# EAGLE board display (EAGLE 5.10)

Size 151.26 x 130.18 mm. Coordinates in mm from the lower left corner, seen from the top.
Outline: 128.65,69.22 121.03,69.22
Outline: 121.03,73.03 128.65,73.03
Outline: 136.27,73.03 136.27,69.22 128.65,69.22
Outline: 128.65,69.22 128.65,73.03
Outline: 128.65,73.03 136.27,73.03
Outline: 113.41,69.22 105.79,69.22
Outline: 105.79,73.03 113.41,73.03
Outline: 121.03,73.03 121.03,69.22
Outline: 121.03,69.22 113.41,69.22
Outline: 113.41,69.22 113.41,73.03
Outline: 113.41,73.03 121.03,73.03
Outline: 98.17,69.22 90.55,69.22
Outline: 90.55,73.03 98.17,73.03
Outline: 105.79,73.03 105.79,69.22
Outline: 105.79,69.22 98.17,69.22
Outline: 98.17,69.22 98.17,73.03
Outline: 98.17,73.03 105.79,73.03
Outline: 82.93,69.22 75.31,69.22
Outline: 75.31,73.03 82.93,73.03
Outline: 90.55,73.03 90.55,69.22
Outline: 90.55,69.22 82.93,69.22
Outline: 82.93,69.22 82.93,73.03
Outline: 82.93,73.03 90.55,73.03
Outline: 67.69,69.22 60.07,69.22
Outline: 60.07,73.03 67.69,73.03
Outline: 75.31,73.03 75.31,69.22
Outline: 75.31,69.22 67.69,69.22
Outline: 67.69,69.22 67.69,73.03
Outline: 67.69,73.03 75.31,73.03
Outline: 52.45,69.22 44.83,69.22
Outline: 44.83,73.03 52.45,73.03
Outline: 60.07,73.03 60.07,69.22
Outline: 60.07,69.22 52.45,69.22
Outline: 52.45,69.22 52.45,73.03
Outline: 52.45,73.03 60.07,73.03
Outline: 37.21,69.22 29.59,69.22
Outline: 29.59,73.03 37.21,73.03
Outline: 44.83,73.03 44.83,69.22
Outline: 44.83,69.22 37.21,69.22
Outline: 37.21,69.22 37.21,73.03
Outline: 37.21,73.03 44.83,73.03
Outline: 21.97,69.22 14.35,69.22 14.35,73.03
Outline: 14.35,73.03 21.97,73.03
Outline: 29.59,73.03 29.59,69.22
Outline: 29.59,69.22 21.97,69.22
Outline: 21.97,69.22 21.97,73.03
Outline: 21.97,73.03 29.59,73.03
Outline: 128.65,76.83 121.03,76.83
Outline: 121.03,80.64 128.65,80.64
Outline: 136.27,80.64 136.27,76.83 128.65,76.83
Outline: 128.65,76.83 128.65,80.64
Outline: 128.65,80.64 136.27,80.64
Outline: 113.41,76.83 105.79,76.83
Outline: 105.79,80.64 113.41,80.64
Outline: 121.03,80.64 121.03,76.83
Outline: 121.03,76.83 113.41,76.83
Outline: 113.41,76.83 113.41,80.64
Outline: 113.41,80.64 121.03,80.64
Outline: 98.17,76.83 90.55,76.83
Outline: 90.55,80.64 98.17,80.64
Outline: 105.79,80.64 105.79,76.83
Outline: 105.79,76.83 98.17,76.83
Outline: 98.17,76.83 98.17,80.64
Outline: 98.17,80.64 105.79,80.64
Outline: 82.93,76.83 75.31,76.83
Outline: 75.31,80.64 82.93,80.64
Outline: 90.55,80.64 90.55,76.83
Outline: 90.55,76.83 82.93,76.83
Outline: 82.93,76.83 82.93,80.64
Outline: 82.93,80.64 90.55,80.64
Outline: 67.69,76.83 60.07,76.83
Outline: 60.07,80.64 67.69,80.64
Outline: 75.31,80.64 75.31,76.83
Outline: 75.31,76.83 67.69,76.83
Outline: 67.69,76.83 67.69,80.64
Outline: 67.69,80.64 75.31,80.64
Outline: 52.45,76.83 44.83,76.83
Outline: 44.83,80.64 52.45,80.64
Outline: 60.07,80.64 60.07,76.83
Outline: 60.07,76.83 52.45,76.83
Outline: 52.45,76.83 52.45,80.64
Outline: 52.45,80.64 60.07,80.64
Outline: 37.21,76.83 29.59,76.83
Outline: 29.59,80.64 37.21,80.64
Outline: 44.83,80.64 44.83,76.83
Outline: 44.83,76.83 37.21,76.83
Outline: 37.21,76.83 37.21,80.64
Outline: 37.21,80.64 44.83,80.64
Outline: 21.97,76.83 14.35,76.83 14.35,80.64 21.97,80.64
Outline: 29.59,80.64 29.59,76.83
Outline: 29.59,76.83 21.97,76.83
Outline: 21.97,76.83 21.97,80.64
Outline: 21.97,80.64 29.59,80.64
Outline: 128.65,84.45 121.03,84.45
Outline: 121.03,88.27 128.65,88.27
Outline: 136.27,88.27 136.27,84.45 128.65,84.45
Outline: 128.65,84.45 128.65,88.27
Outline: 128.65,88.27 136.27,88.27
Outline: 113.41,84.45 105.79,84.45
Outline: 105.79,88.27 113.41,88.27
Outline: 121.03,88.27 121.03,84.45
Outline: 121.03,84.45 113.41,84.45
Outline: 113.41,84.45 113.41,88.27
Outline: 113.41,88.27 121.03,88.27
Outline: 98.17,84.45 90.55,84.45
Outline: 90.55,88.27 98.17,88.27
Outline: 105.79,88.27 105.79,84.45
Outline: 105.79,84.45 98.17,84.45
Outline: 98.17,84.45 98.17,88.27
Outline: 98.17,88.27 105.79,88.27
Outline: 82.93,84.45 75.31,84.45
Outline: 75.31,88.27 82.93,88.27
Outline: 90.55,88.27 90.55,84.45
Outline: 90.55,84.45 82.93,84.45
Outline: 82.93,84.45 82.93,88.27
Outline: 82.93,88.27 90.55,88.27
Outline: 67.69,84.45 60.07,84.45
Outline: 60.07,88.27 67.69,88.27
Outline: 75.31,88.27 75.31,84.45
Outline: 75.31,84.45 67.69,84.45
Outline: 67.69,84.45 67.69,88.27
Outline: 67.69,88.27 75.31,88.27
Outline: 52.45,84.45 44.83,84.45
Outline: 44.83,88.27 52.45,88.27
Outline: 60.07,88.27 60.07,84.45
Outline: 60.07,84.45 52.45,84.45
Outline: 52.45,84.45 52.45,88.27
Outline: 52.45,88.27 60.07,88.27
Outline: 37.21,84.45 29.59,84.45
Outline: 29.59,88.27 37.21,88.27
Outline: 44.83,88.27 44.83,84.45
Outline: 44.83,84.45 37.21,84.45
Outline: 37.21,84.45 37.21,88.27
Outline: 37.21,88.27 44.83,88.27
Outline: 21.97,84.45 14.35,84.45 14.35,88.27
Outline: 29.59,88.27 29.59,84.45
Outline: 29.59,84.45 21.97,84.45
Outline: 21.97,84.45 21.97,88.27
Outline: 21.97,88.27 29.59,88.27
Outline: 128.65,92.08 121.03,92.08
Outline: 121.03,95.89 128.65,95.89
Outline: 136.27,95.89 136.27,92.08
Outline: 136.27,92.08 128.65,92.08
Outline: 128.65,92.08 128.65,95.89
Outline: 128.65,95.89 136.27,95.89
Outline: 113.41,92.08 105.79,92.08
Outline: 105.79,95.89 113.41,95.89
Outline: 121.03,95.89 121.03,92.08
Outline: 121.03,92.08 113.41,92.08
Outline: 113.41,92.08 113.41,95.89
Outline: 113.41,95.89 121.03,95.89
Outline: 98.17,92.08 90.55,92.08
Outline: 90.55,95.89 98.17,95.89
Outline: 105.79,95.89 105.79,92.08
Outline: 105.79,92.08 98.17,92.08
Outline: 98.17,92.08 98.17,95.89
Outline: 98.17,95.89 105.79,95.89
Outline: 82.93,92.08 75.31,92.08
Outline: 75.31,95.89 82.93,95.89
Outline: 90.55,95.89 90.55,92.08
Outline: 90.55,92.08 82.93,92.08
Outline: 82.93,92.08 82.93,95.89
Outline: 82.93,95.89 90.55,95.89
Outline: 67.69,92.08 60.07,92.08
Outline: 60.07,95.89 67.69,95.89
Outline: 75.31,95.89 75.31,92.08
Outline: 75.31,92.08 67.69,92.08
Outline: 67.69,92.08 67.69,95.89
Outline: 67.69,95.89 75.31,95.89
Outline: 52.45,92.08 44.83,92.08
Outline: 44.83,95.89 52.45,95.89
Outline: 60.07,95.89 60.07,92.08
Outline: 60.07,92.08 52.45,92.08
Outline: 52.45,92.08 52.45,95.89
Outline: 52.45,95.89 60.07,95.89
Outline: 37.21,92.08 29.59,92.08
Outline: 29.59,95.89 37.21,95.89
Outline: 44.83,95.89 44.83,92.08
Outline: 44.83,92.08 37.21,92.08
Outline: 37.21,92.08 37.21,95.89
Outline: 37.21,95.89 44.83,95.89
Outline: 21.97,92.08 14.35,92.08 14.35,95.89
Outline: 29.59,95.89 29.59,92.08
Outline: 29.59,92.08 21.97,92.08
Outline: 21.97,92.08 21.97,95.89
Outline: 21.97,95.89 29.59,95.89
Outline: 128.65,99.69 121.03,99.69
Outline: 121.03,103.5 128.65,103.5
Outline: 128.65,99.69 136.27,99.69 136.27,100.46
Outline: 128.65,99.69 128.65,103.5
Outline: 128.65,103.5 136.27,103.5
Outline: 113.41,99.69 105.79,99.69
Outline: 105.79,103.5 113.41,103.5
Outline: 121.03,103.5 121.03,99.69
Outline: 121.03,99.69 113.41,99.69
Outline: 113.41,99.69 113.41,103.5
Outline: 113.41,103.5 121.03,103.5
Outline: 98.17,99.69 90.55,99.69
Outline: 90.55,103.5 98.17,103.5
Outline: 105.79,103.5 105.79,99.69
Outline: 105.79,99.69 98.17,99.69
Outline: 98.17,99.69 98.17,103.5
Outline: 98.17,103.5 105.79,103.5
Outline: 82.93,99.69 75.31,99.69
Outline: 75.31,103.5 82.93,103.5
Outline: 90.55,103.5 90.55,99.69
Outline: 90.55,99.69 82.93,99.69
Outline: 82.93,99.69 82.93,103.5
Outline: 82.93,103.5 90.55,103.5
Outline: 67.69,99.69 60.07,99.69
Outline: 60.07,103.5 67.69,103.5
Outline: 75.31,103.5 75.31,99.69
Outline: 75.31,99.69 67.69,99.69
Outline: 67.69,99.69 67.69,103.5
Outline: 67.69,103.5 75.31,103.5
Outline: 52.45,99.69 44.83,99.69
Outline: 44.83,103.5 52.45,103.5
Outline: 60.07,103.5 60.07,99.69
Outline: 60.07,99.69 52.45,99.69
Outline: 52.45,99.69 52.45,103.5
Outline: 52.45,103.5 60.07,103.5
Outline: 37.21,99.69 29.59,99.69
Outline: 29.59,103.5 37.21,103.5
Outline: 44.83,103.5 44.83,99.69
Outline: 44.83,99.69 37.21,99.69
Outline: 37.21,99.69 37.21,103.5
Outline: 37.21,103.5 44.83,103.5
Outline: 21.97,99.69 14.35,99.69
Outline: 14.35,99.69 14.35,102.74
Outline: 14.35,102.74 14.35,103.5 21.97,103.5
Outline: 29.59,103.5 29.59,99.69
Outline: 29.59,99.69 21.97,99.69
Outline: 21.97,99.69 21.97,103.5
Outline: 21.97,103.5 29.59,103.5
Outline: 128.65,107.31 121.03,107.31
Outline: 121.03,111.12 128.65,111.12
Outline: 136.27,107.31 136.27,111.12 128.65,111.12
Outline: 136.27,107.31 128.65,107.31
Outline: 128.65,107.31 128.65,111.12
Outline: 113.41,107.31 105.79,107.31
Outline: 105.79,111.12 113.41,111.12
Outline: 121.03,111.12 121.03,107.31
Outline: 121.03,107.31 113.41,107.31
Outline: 113.41,107.31 113.41,111.12
Outline: 113.41,111.12 121.03,111.12
Outline: 98.17,107.31 90.55,107.31
Outline: 90.55,111.12 98.17,111.12
Outline: 105.79,111.12 105.79,107.31
Outline: 105.79,107.31 98.17,107.31
Outline: 98.17,107.31 98.17,111.12
Outline: 98.17,111.12 105.79,111.12
Outline: 82.93,107.31 75.31,107.31
Outline: 75.31,111.12 82.93,111.12
Outline: 90.55,111.12 90.55,107.31
Outline: 90.55,107.31 82.93,107.31
Outline: 82.93,107.31 82.93,111.12
Outline: 82.93,111.12 90.55,111.12
Outline: 67.69,107.31 60.07,107.31
Outline: 60.07,111.12 67.69,111.12
Outline: 75.31,111.12 75.31,107.31
Outline: 75.31,107.31 67.69,107.31
Outline: 67.69,107.31 67.69,111.12
Outline: 67.69,111.12 75.31,111.12
Outline: 52.45,107.31 44.83,107.31
Outline: 44.83,111.12 52.45,111.12
Outline: 60.07,111.12 60.07,107.31
Outline: 60.07,107.31 52.45,107.31
Outline: 52.45,107.31 52.45,111.12
Outline: 52.45,111.12 60.07,111.12
Outline: 37.21,107.31 29.59,107.31
Outline: 29.59,111.12 37.21,111.12
Outline: 44.83,111.12 44.83,107.31
Outline: 44.83,107.31 37.21,107.31
Outline: 37.21,107.31 37.21,111.12
Outline: 37.21,111.12 44.83,111.12
Outline: 21.97,107.31 14.35,107.31 14.35,111.12 21.97,111.12
Outline: 29.59,111.12 29.59,107.31
Outline: 29.59,107.31 21.97,107.31
Outline: 21.97,107.31 21.97,111.12
Outline: 21.97,111.12 29.59,111.12
Outline: 128.65,114.94 121.03,114.94
Outline: 121.03,118.75 128.65,118.75
Outline: 136.27,114.94 136.27,118.75 128.65,118.75
Outline: 136.27,114.94 128.65,114.94
Outline: 128.65,114.94 128.65,118.75
Outline: 113.41,114.94 105.79,114.94
Outline: 105.79,118.75 113.41,118.75
Outline: 121.03,118.75 121.03,114.94
Outline: 121.03,114.94 113.41,114.94
Outline: 113.41,114.94 113.41,118.75
Outline: 113.41,118.75 121.03,118.75
Outline: 98.17,114.94 90.55,114.94
Outline: 90.55,118.75 98.17,118.75
Outline: 105.79,118.75 105.79,114.94
Outline: 105.79,114.94 98.17,114.94
Outline: 98.17,114.94 98.17,118.75
Outline: 98.17,118.75 105.79,118.75
Outline: 82.93,114.94 75.31,114.94
Outline: 75.31,118.75 82.93,118.75
Outline: 90.55,118.75 90.55,114.94
Outline: 90.55,114.94 82.93,114.94
Outline: 82.93,114.94 82.93,118.75
Outline: 82.93,118.75 90.55,118.75
Outline: 67.69,114.94 60.07,114.94
Outline: 60.07,118.75 67.69,118.75
Outline: 75.31,118.75 75.31,114.94
Outline: 75.31,114.94 67.69,114.94
Outline: 67.69,114.94 67.69,118.75
Outline: 67.69,118.75 75.31,118.75
Outline: 52.45,114.94 44.83,114.94
Outline: 44.83,118.75 52.45,118.75
Outline: 60.07,118.75 60.07,114.94
Outline: 60.07,114.94 52.45,114.94
Outline: 52.45,114.94 52.45,118.75
Outline: 52.45,118.75 60.07,118.75
Outline: 37.21,114.94 29.59,114.94
Outline: 29.59,118.75 37.21,118.75
Outline: 44.83,118.75 44.83,114.94
Outline: 44.83,114.94 37.21,114.94
Outline: 37.21,114.94 37.21,118.75
Outline: 37.21,118.75 44.83,118.75
Outline: 21.97,118.75 14.35,118.75 14.35,114.94
Outline: 29.59,118.75 29.59,114.94
Outline: 29.59,114.94 21.97,114.94
Outline: 21.97,114.94 21.97,118.75
Outline: 21.97,118.75 29.59,118.75
Outline: 128.65,122.56 121.03,122.56
Outline: 121.03,126.36 128.65,126.36
Outline: 136.27,122.56 136.27,126.36 128.65,126.36
Outline: 136.27,122.56 128.65,122.56
Outline: 128.65,122.56 128.65,126.36
Outline: 113.41,122.56 105.79,122.56
Outline: 105.79,126.36 113.41,126.36
Outline: 121.03,126.36 121.03,122.56
Outline: 121.03,122.56 113.41,122.56
Outline: 113.41,122.56 113.41,126.36
Outline: 113.41,126.36 121.03,126.36
Outline: 98.17,122.56 90.55,122.56
Outline: 90.55,126.36 98.17,126.36
Outline: 105.79,126.36 105.79,122.56
Outline: 105.79,122.56 98.17,122.56
Outline: 98.17,122.56 98.17,126.36
Outline: 98.17,126.36 105.79,126.36
Outline: 82.93,122.56 75.31,122.56
Outline: 75.31,126.36 82.93,126.36
Outline: 90.55,126.36 90.55,122.56
Outline: 90.55,122.56 82.93,122.56
Outline: 82.93,122.56 82.93,126.36
Outline: 82.93,126.36 90.55,126.36
Outline: 67.69,122.56 60.07,122.56
Outline: 60.07,126.36 67.69,126.36
Outline: 75.31,126.36 75.31,122.56
Outline: 75.31,122.56 67.69,122.56
Outline: 67.69,122.56 67.69,126.36
Outline: 67.69,126.36 75.31,126.36
Outline: 52.45,122.56 44.83,122.56
Outline: 44.83,126.36 52.45,126.36
Outline: 60.07,126.36 60.07,122.56
Outline: 60.07,122.56 52.45,122.56
Outline: 52.45,122.56 52.45,126.36
Outline: 52.45,126.36 60.07,126.36
Outline: 37.21,122.56 29.59,122.56
Outline: 29.59,126.36 37.21,126.36
Outline: 44.83,126.36 44.83,122.56
Outline: 44.83,122.56 37.21,122.56
Outline: 37.21,122.56 37.21,126.36
Outline: 37.21,126.36 44.83,126.36
Outline: 21.97,126.36 14.35,126.36 14.35,122.56
Outline: 29.59,126.36 29.59,122.56
Outline: 29.59,122.56 21.97,122.56
Outline: 21.97,122.56 21.97,126.36
Outline: 21.97,126.36 29.59,126.36
Outline: 136.27,103.5 136.27,104.27 139.7,104.27 139.7,100.46
Outline: 136.27,103.5 136.27,100.46
Outline: 140.97,100.46 140.97,107.31 136.27,107.31
Outline: 140.97,100.46 142.24,100.46
Outline: 142.24,100.46 142.24,114.94 136.27,114.94
Outline: 142.24,100.46 143.51,100.46
Outline: 143.51,100.46 143.51,122.56 136.27,122.56
Outline: 143.51,100.46 144.78,100.46 144.78,109.22
Outline: 144.78,109.22 144.78,130.18
Outline: 14.35,130.18 75.31,130.18
Outline: 75.31,130.18 144.78,130.18
Outline: 140.97,100.46 139.7,100.46
Outline: 139.7,100.46 136.27,100.46
Outline: 136.27,95.89 138.3,95.89 138.3,98.81 139.7,98.81
Outline: 139.7,98.81 140.97,98.81 140.97,94.87 142.24,94.87
Outline: 142.24,94.87 142.24,98.81
Outline: 142.24,98.81 142.24,100.46
Outline: 136.27,92.08 139.7,92.08
Outline: 139.7,92.08 142.24,92.08 142.24,94.87
Outline: 139.7,98.81 139.7,92.08
Outline: 142.24,98.81 143.51,98.81
Outline: 143.51,98.81 144.78,98.81
Outline: 144.78,98.81 146.05,98.81
Outline: 136.27,88.27 143.51,88.27 143.51,98.81
Outline: 136.27,80.64 144.78,80.64 144.78,98.81
Outline: 136.27,73.03 146.05,73.03 146.05,98.81
Outline: 146.05,98.81 146.05,104.65 148.97,104.65 148.97,109.22 144.78,109.22
Outline: 11.05,102.74 11.05,98.93 14.35,98.93 14.35,99.69
Outline: 9.78,102.74 9.78,95.89 14.35,95.89
Outline: 14.35,95.89 21.97,95.89
Outline: 9.78,102.74 8.51,102.74
Outline: 8.51,102.74 8.51,88.27 14.35,88.27
Outline: 14.35,88.27 21.97,88.27
Outline: 8.51,102.74 7.24,102.74
Outline: 7.24,102.74 7.24,80.64 14.48,80.64
Outline: 7.24,102.74 5.97,102.74 5.97,93.98
Outline: 9.78,102.74 11.05,102.74
Outline: 11.05,102.74 14.35,102.74
Outline: 14.48,107.31 12.45,107.31 12.45,104.39 11.05,104.39
Outline: 11.05,104.39 9.78,104.39 9.78,108.33 8.51,108.33
Outline: 8.51,108.33 8.51,104.39
Outline: 8.51,104.39 8.51,102.74
Outline: 14.48,111.12 11.05,111.12
Outline: 11.05,111.12 8.51,111.12 8.51,108.33
Outline: 11.05,104.39 11.05,111.12
Outline: 8.51,104.39 7.24,104.39
Outline: 7.24,104.39 5.97,104.39
Outline: 5.97,104.39 4.7,104.39
Outline: 21.97,114.94 14.35,114.94
Outline: 14.35,114.94 7.24,114.94 7.24,104.39
Outline: 21.97,122.56 14.35,122.56
Outline: 14.35,122.56 5.97,122.56 5.97,104.39
Outline: 14.48,130.18 4.7,130.18
Outline: 4.7,130.18 4.7,104.39
Outline: 4.7,104.39 4.7,98.55 1.78,98.55 1.78,93.98 5.97,93.98
Outline: 14.35,73.03 5.97,73.03 5.97,93.98
Outline: 135.13,53.85 132.21,53.85
Outline: 132.21,53.85 85.47,53.85
Outline: 85.47,53.85 85.47,48.13
Outline: 85.47,48.13 85.47,44.32 91.31,44.32 91.31,51.94 112.39,51.94 112.39,44.32 118.24,44.32 118.24,51.94 130.94,51.94 130.94,42.42 137.67,42.42 137.67,52.58
Outline: 137.67,52.58 136.4,52.58 136.4,49.15
Outline: 136.4,49.15 135.13,49.15
Outline: 135.13,49.15 135.13,54.99
Outline: 135.13,54.99 135.13,58.55 132.21,58.55 132.21,53.85
Outline: 132.21,53.85 132.21,49.15
Outline: 132.21,49.15 135.13,49.15
Outline: 132.21,49.15 132.21,43.69 136.4,43.69 136.4,49.15
Outline: 137.67,52.58 138.94,52.58
Outline: 138.94,52.58 138.94,41.15 129.67,41.15 129.67,50.04 123.32,50.04
Outline: 123.32,50.04 120.78,50.04 120.78,42.42
Outline: 120.78,42.42 109.86,42.42
Outline: 109.86,42.42 109.86,50.04 107.31,50.04
Outline: 107.31,50.04 96.39,50.04
Outline: 96.39,50.04 96.39,42.29 93.85,42.29
Outline: 93.85,42.29 82.93,42.29
Outline: 82.93,42.29 82.93,48.13
Outline: 82.93,48.13 85.47,48.13
Outline: 82.93,48.13 80.39,48.13
Outline: 80.39,48.13 80.39,42.29 82.93,42.29
Outline: 138.94,52.58 140.21,52.58
Outline: 140.21,52.58 140.21,39.88 128.4,39.88 128.4,48.13 125.86,48.13 125.86,40.51 104.78,40.51 104.78,48.13 98.93,48.13 98.93,40.39 77.85,40.39 77.85,48.13
Outline: 77.85,48.13 80.39,48.13
Outline: 77.85,48.13 75.31,48.13
Outline: 141.48,38.48 141.48,52.58 140.21,52.58
Outline: 93.85,42.29 93.85,50.04 96.39,50.04
Outline: 107.31,50.04 107.31,42.42 109.86,42.42
Outline: 120.78,42.42 123.32,42.42 123.32,50.04
Outline: 135.13,54.99 136.4,54.99
Outline: 136.4,54.99 136.4,59.82 130.94,59.82 130.94,55.88 118.24,55.88 118.24,63.37 112.39,63.37 112.39,55.88 91.31,55.88 91.31,63.5 85.47,63.5 85.47,59.44
Outline: 85.47,59.44 82.93,59.44
Outline: 82.93,59.44 82.93,65.41
Outline: 82.93,65.41 80.39,65.41 80.39,59.44
Outline: 77.85,59.44 77.85,67.31 98.93,67.31 98.93,59.69 104.78,59.69 104.78,67.31 125.86,67.31 125.86,59.69 128.4,59.69 128.4,62.36 138.94,62.36 138.94,54.99
Outline: 138.94,54.99 137.67,54.99
Outline: 136.4,54.99 137.67,54.99
Outline: 137.67,54.99 137.67,61.09 129.67,61.09 129.67,57.66 123.32,57.66
Outline: 123.32,57.66 123.32,65.41 120.78,65.41
Outline: 120.78,65.41 120.78,57.66 123.32,57.66
Outline: 138.94,54.99 140.21,54.99
Outline: 140.21,54.99 140.21,63.63 128.4,63.63 128.4,69.09
Outline: 128.4,69.09 75.31,69.09
Outline: 75.31,69.09 75.31,59.44
Outline: 75.31,59.44 77.85,59.44
Outline: 77.85,59.44 80.39,59.44
Outline: 80.39,59.44 82.93,59.44
Outline: 85.47,53.85 85.47,59.44
Outline: 82.93,65.41 93.85,65.41
Outline: 93.85,65.41 93.85,57.66 96.52,57.66
Outline: 96.52,57.66 107.31,57.66
Outline: 107.31,57.66 109.86,57.66 109.86,65.41
Outline: 109.86,65.41 120.78,65.41
Outline: 109.86,65.41 107.31,65.41 107.31,57.66
Outline: 93.85,65.41 96.52,65.41 96.52,57.66
Outline: 140.21,54.99 141.48,54.99 141.48,69.09 128.4,69.09
Outline: 15.37,53.72 18.29,53.72
Outline: 18.29,53.72 65.02,53.72
Outline: 65.02,53.72 65.02,59.44
Outline: 65.02,59.44 65.02,63.25 59.18,63.25 59.18,55.63 38.1,55.63 38.1,63.25 32.26,63.25 32.26,55.63 19.56,55.63 19.56,65.15 12.83,65.15 12.83,54.99
Outline: 12.83,54.99 14.1,54.99 14.1,58.42
Outline: 14.1,58.42 15.37,58.42
Outline: 15.37,58.42 15.37,52.58
Outline: 15.37,52.58 15.37,49.02 18.29,49.02 18.29,53.72
Outline: 18.29,53.72 18.29,58.42
Outline: 18.29,58.42 15.37,58.42
Outline: 18.29,58.42 18.29,63.88 14.1,63.88 14.1,58.42
Outline: 12.83,54.99 11.56,54.99
Outline: 11.56,54.99 11.56,66.42 20.83,66.42 20.83,57.53 27.18,57.53
Outline: 27.18,57.53 29.72,57.53 29.72,65.15
Outline: 29.72,65.15 40.64,65.15
Outline: 40.64,65.15 40.64,57.53 43.18,57.53
Outline: 43.18,57.53 54.1,57.53
Outline: 54.1,57.53 54.1,65.28 56.64,65.28
Outline: 56.64,65.28 67.56,65.28
Outline: 67.56,65.28 67.56,59.44
Outline: 67.56,59.44 65.02,59.44
Outline: 67.56,59.44 70.1,59.44
Outline: 70.1,59.44 70.1,65.28 67.56,65.28
Outline: 11.56,54.99 10.29,54.99
Outline: 10.29,54.99 10.29,67.69 22.1,67.69 22.1,59.44 24.64,59.44 24.64,67.06 45.72,67.06 45.72,59.44 51.56,59.44 51.56,67.18 72.64,67.18 72.64,59.44
Outline: 72.64,59.44 70.1,59.44
Outline: 72.64,59.44 75.31,59.44
Outline: 75.31,69.09 9.02,69.09 9.02,54.99 10.29,54.99
Outline: 56.64,65.28 56.64,57.53 54.1,57.53
Outline: 43.18,57.53 43.18,65.15 40.64,65.15
Outline: 29.72,65.15 27.18,65.15 27.18,57.53
Outline: 15.37,52.58 14.1,52.58
Outline: 14.1,52.58 14.1,47.75 19.56,47.75 19.56,51.69 32.26,51.69 32.26,44.2 38.1,44.2 38.1,51.69 59.18,51.69 59.18,44.07 65.02,44.07 65.02,48.13
Outline: 65.02,48.13 67.56,48.13
Outline: 67.56,48.13 67.56,42.16
Outline: 67.56,42.16 70.1,42.16 70.1,48.13
Outline: 72.64,48.13 72.64,40.26 51.56,40.26 51.56,47.88 45.72,47.88 45.72,40.26 24.64,40.26 24.64,47.88 22.1,47.88 22.1,45.21 11.56,45.21 11.56,52.58
Outline: 11.56,52.58 12.83,52.58
Outline: 14.1,52.58 12.83,52.58
Outline: 12.83,52.58 12.83,46.48 20.83,46.48 20.83,49.91 27.18,49.91
Outline: 27.18,49.91 27.18,42.16 29.72,42.16
Outline: 29.72,42.16 29.72,49.91 27.18,49.91
Outline: 11.56,52.58 10.29,52.58
Outline: 10.29,52.58 10.29,43.94 22.1,43.94 22.1,38.48
Outline: 22.1,38.48 75.31,38.48
Outline: 75.31,38.48 75.31,48.13
Outline: 75.31,48.13 72.64,48.13
Outline: 72.64,48.13 70.1,48.13
Outline: 70.1,48.13 67.56,48.13
Outline: 65.02,53.72 65.02,48.13
Outline: 67.56,42.16 56.64,42.16
Outline: 56.64,42.16 56.64,49.91 53.98,49.91
Outline: 53.98,49.91 43.18,49.91
Outline: 43.18,49.91 40.64,49.91 40.64,42.16
Outline: 40.64,42.16 29.72,42.16
Outline: 40.64,42.16 43.18,42.16 43.18,49.91
Outline: 56.64,42.16 53.98,42.16 53.98,49.91
Outline: 10.29,52.58 9.02,52.58 9.02,38.48
Outline: 135.13,23.24 132.21,23.24
Outline: 132.21,23.24 85.47,23.24
Outline: 85.47,23.24 85.47,17.53
Outline: 85.47,17.53 85.47,13.72 91.31,13.72 91.31,21.34 112.39,21.34 112.39,13.72 118.24,13.72 118.24,21.34 130.94,21.34 130.94,11.81 137.67,11.81 137.67,21.97
Outline: 137.67,21.97 136.4,21.97 136.4,18.54
Outline: 136.4,18.54 135.13,18.54
Outline: 135.13,18.54 135.13,24.38
Outline: 135.13,24.38 135.13,27.94 132.21,27.94 132.21,23.24
Outline: 132.21,23.24 132.21,18.54
Outline: 132.21,18.54 135.13,18.54
Outline: 132.21,18.54 132.21,13.08 136.4,13.08 136.4,18.54
Outline: 137.67,21.97 138.94,21.97
Outline: 138.94,21.97 138.94,10.54 129.67,10.54 129.67,19.43 123.32,19.43
Outline: 123.32,19.43 120.78,19.43 120.78,11.81
Outline: 120.78,11.81 109.86,11.81
Outline: 109.86,11.81 109.86,19.43 107.31,19.43
Outline: 107.31,19.43 96.39,19.43
Outline: 96.39,19.43 96.39,11.68 93.85,11.68
Outline: 93.85,11.68 82.93,11.68
Outline: 82.93,11.68 82.93,17.53
Outline: 82.93,17.53 85.47,17.53
Outline: 82.93,17.53 80.39,17.53
Outline: 80.39,17.53 80.39,11.68 82.93,11.68
Outline: 138.94,21.97 140.21,21.97
Outline: 140.21,21.97 140.21,9.27 128.4,9.27 128.4,17.53 125.86,17.53 125.86,9.91 104.78,9.91 104.78,17.53 98.93,17.53 98.93,9.78 77.85,9.78 77.85,17.53
Outline: 77.85,17.53 80.39,17.53
Outline: 77.85,17.53 75.31,17.53
Outline: 75.31,7.87 141.48,7.87 141.48,21.97 140.21,21.97
Outline: 93.85,11.68 93.85,19.43 96.39,19.43
Outline: 107.31,19.43 107.31,11.81 109.86,11.81
Outline: 120.78,11.81 123.32,11.81 123.32,19.43
Outline: 135.13,24.38 136.4,24.38
Outline: 136.4,24.38 136.4,29.21 130.94,29.21 130.94,25.27 118.24,25.27 118.24,32.77 112.39,32.77 112.39,25.27 91.31,25.27 91.31,32.89 85.47,32.89 85.47,28.83
Outline: 85.47,28.83 82.93,28.83
Outline: 82.93,28.83 82.93,34.8
Outline: 82.93,34.8 80.39,34.8 80.39,28.83
Outline: 77.85,28.83 77.85,36.7 98.93,36.7 98.93,29.08 104.78,29.08 104.78,36.7 125.86,36.7 125.86,29.08 128.4,29.08 128.4,31.75 138.94,31.75 138.94,24.38
Outline: 138.94,24.38 137.67,24.38
Outline: 136.4,24.38 137.67,24.38
Outline: 137.67,24.38 137.67,30.48 129.67,30.48 129.67,27.05 123.32,27.05
Outline: 123.32,27.05 123.32,34.8 120.78,34.8
Outline: 120.78,34.8 120.78,27.05 123.32,27.05
Outline: 138.94,24.38 140.21,24.38
Outline: 140.21,24.38 140.21,33.02 128.4,33.02 128.4,38.48
Outline: 128.4,38.48 75.31,38.48
Outline: 75.31,38.48 75.31,28.83
Outline: 75.31,28.83 77.85,28.83
Outline: 77.85,28.83 80.39,28.83
Outline: 80.39,28.83 82.93,28.83
Outline: 85.47,23.24 85.47,28.83
Outline: 82.93,34.8 93.85,34.8
Outline: 93.85,34.8 93.85,27.05 96.52,27.05
Outline: 96.52,27.05 107.31,27.05
Outline: 107.31,27.05 109.86,27.05 109.86,34.8
Outline: 109.86,34.8 120.78,34.8
Outline: 109.86,34.8 107.31,34.8 107.31,27.05
Outline: 93.85,34.8 96.52,34.8 96.52,27.05
Outline: 140.21,24.38 141.48,24.38 141.48,38.48
Outline: 141.48,38.48 128.4,38.48
Outline: 15.37,23.11 18.29,23.11
Outline: 18.29,23.11 65.02,23.11
Outline: 65.02,23.11 65.02,28.83
Outline: 65.02,28.83 65.02,32.64 59.18,32.64 59.18,25.02 38.1,25.02 38.1,32.64 32.26,32.64 32.26,25.02 19.56,25.02 19.56,34.54 12.83,34.54 12.83,24.38
Outline: 12.83,24.38 14.1,24.38 14.1,27.81
Outline: 14.1,27.81 15.37,27.81
Outline: 15.37,27.81 15.37,21.97
Outline: 15.37,21.97 15.37,18.41 18.29,18.41 18.29,23.11
Outline: 18.29,23.11 18.29,27.81
Outline: 18.29,27.81 15.37,27.81
Outline: 18.29,27.81 18.29,33.27 14.1,33.27 14.1,27.81
Outline: 12.83,24.38 11.56,24.38
Outline: 11.56,24.38 11.56,35.81 20.83,35.81 20.83,26.92 27.18,26.92
Outline: 27.18,26.92 29.72,26.92 29.72,34.54
Outline: 29.72,34.54 40.64,34.54
Outline: 40.64,34.54 40.64,26.92 43.18,26.92
Outline: 43.18,26.92 54.1,26.92
Outline: 54.1,26.92 54.1,34.67 56.64,34.67
Outline: 56.64,34.67 67.56,34.67
Outline: 67.56,34.67 67.56,28.83
Outline: 67.56,28.83 65.02,28.83
Outline: 67.56,28.83 70.1,28.83
Outline: 70.1,28.83 70.1,34.67 67.56,34.67
Outline: 11.56,24.38 10.29,24.38
Outline: 10.29,24.38 10.29,37.08 22.1,37.08 22.1,28.83 24.64,28.83 24.64,36.45 45.72,36.45 45.72,28.83 51.56,28.83 51.56,36.58 72.64,36.58 72.64,28.83
Outline: 72.64,28.83 70.1,28.83
Outline: 72.64,28.83 75.31,28.83
Outline: 22.1,38.48 9.02,38.48
Outline: 9.02,38.48 9.02,24.38 10.29,24.38
Outline: 56.64,34.67 56.64,26.92 54.1,26.92
Outline: 43.18,26.92 43.18,34.54 40.64,34.54
Outline: 29.72,34.54 27.18,34.54 27.18,26.92
Outline: 15.37,21.97 14.1,21.97
Outline: 14.1,21.97 14.1,17.14 19.56,17.14 19.56,21.08 32.26,21.08 32.26,13.59 38.1,13.59 38.1,21.08 59.18,21.08 59.18,13.46 65.02,13.46 65.02,17.53
Outline: 65.02,17.53 67.56,17.53
Outline: 67.56,17.53 67.56,11.56
Outline: 67.56,11.56 70.1,11.56 70.1,17.53
Outline: 72.64,17.53 72.64,9.65 51.56,9.65 51.56,17.27 45.72,17.27 45.72,9.65 24.64,9.65 24.64,17.27 22.1,17.27 22.1,14.61 11.56,14.61 11.56,21.97
Outline: 11.56,21.97 12.83,21.97
Outline: 14.1,21.97 12.83,21.97
Outline: 12.83,21.97 12.83,15.88 20.83,15.88 20.83,19.3 27.18,19.3
Outline: 27.18,19.3 27.18,11.56 29.72,11.56
Outline: 29.72,11.56 29.72,19.3 27.18,19.3
Outline: 11.56,21.97 10.29,21.97
Outline: 10.29,21.97 10.29,13.34 22.1,13.34 22.1,7.87
Outline: 22.1,7.87 75.31,7.87
Outline: 75.31,7.87 75.31,17.53
Outline: 75.31,17.53 72.64,17.53
Outline: 72.64,17.53 70.1,17.53
Outline: 70.1,17.53 67.56,17.53
Outline: 65.02,23.11 65.02,17.53
Outline: 67.56,11.56 56.64,11.56
Outline: 56.64,11.56 56.64,19.3 53.98,19.3
Outline: 53.98,19.3 43.18,19.3
Outline: 43.18,19.3 40.64,19.3 40.64,11.56
Outline: 40.64,11.56 29.72,11.56
Outline: 40.64,11.56 43.18,11.56 43.18,19.3
Outline: 56.64,11.56 53.98,11.56 53.98,19.3
Outline: 10.29,21.97 9.02,21.97 9.02,7.87 22.1,7.87
Outline: 75.31,73.03 75.31,130.18
Outline: 4.7,130.18 0,130.18 0,0 151.26,0 151.26,130.18 144.78,130.18
Copper layers (1*16): Top 0.035mm / dielectric 1.5mm / Bottom 0.035mm
Design rules "default": minimum track width 10mil, minimum drill 24mil, track to track 8mil, track to pad 8mil, pad to pad 8mil, via to via 8mil, smd to smd 8mil, copper to edge 40mil, drill to drill 8mil, minimum pad ring 10mil, minimum via ring 8mil, stop-mask expansion 4mil, vias tented up to drill 0mil, thermal gap 10mil

## Footprints (pad centres in the part's own frame; a part is rotated, then mirrored left to right if it is on the bottom)
LED5MM = drill 0.813 octagon: A -1.27,0; K 1.27,0
SO14 = smd 0.6 x 2.2: 1 -3.81,-2.6; 2 -2.54,-2.6; 3 -1.27,-2.6; 4 0,-2.6; 5 1.27,-2.6; 6 2.54,-2.6; 7 3.81,-2.6; 8 3.81,2.6; 9 2.54,2.6; 10 1.27,2.6; 11 0,2.6; 12 -1.27,2.6; 13 -2.54,2.6; 14 -3.81,2.6
SA56-11 = drill 0.8 long: 1 -5.08,-7.62; 2 -2.54,-7.62; 3 0,-7.62; 4 2.54,-7.62; 5 5.08,-7.62; 6 5.08,7.62; 7 2.54,7.62; 8 0,7.62; 9 -2.54,7.62; 10 -5.08,7.62

## Placement (x,y rotation side)
E$1  [LED5MM]  124.84,73.03 90 top
E$2  [LED5MM]  132.46,73.03 90 top
E$3  [LED5MM]  109.6,73.03 90 top
E$4  [LED5MM]  117.22,73.03 90 top
E$5  [LED5MM]  94.36,73.03 90 top
E$6  [LED5MM]  101.98,73.03 90 top
E$7  [LED5MM]  79.12,73.03 90 top
E$8  [LED5MM]  86.74,73.03 90 top
E$9  [LED5MM]  63.88,73.03 90 top
E$10  [LED5MM]  71.5,73.03 90 top
E$11  [LED5MM]  48.64,73.03 90 top
E$12  [LED5MM]  56.26,73.03 90 top
E$13  [LED5MM]  33.4,73.03 90 top
E$14  [LED5MM]  41.02,73.03 90 top
E$15  [LED5MM]  18.16,73.03 90 top
E$16  [LED5MM]  25.78,73.03 90 top
E$17  [LED5MM]  124.84,80.64 90 top
E$18  [LED5MM]  132.46,80.64 90 top
E$19  [LED5MM]  109.6,80.64 90 top
E$20  [LED5MM]  117.22,80.64 90 top
E$21  [LED5MM]  94.36,80.64 90 top
E$22  [LED5MM]  101.98,80.64 90 top
E$23  [LED5MM]  79.12,80.64 90 top
E$24  [LED5MM]  86.74,80.64 90 top
E$25  [LED5MM]  63.88,80.64 90 top
E$26  [LED5MM]  71.5,80.64 90 top
E$27  [LED5MM]  48.64,80.64 90 top
E$28  [LED5MM]  56.26,80.64 90 top
E$29  [LED5MM]  33.4,80.64 90 top
E$30  [LED5MM]  41.02,80.64 90 top
E$31  [LED5MM]  18.16,80.64 90 top
E$32  [LED5MM]  25.78,80.64 90 top
E$33  [LED5MM]  124.84,88.27 90 top
E$34  [LED5MM]  132.46,88.27 90 top
E$35  [LED5MM]  109.6,88.27 90 top
E$36  [LED5MM]  117.22,88.27 90 top
E$37  [LED5MM]  94.36,88.27 90 top
E$38  [LED5MM]  101.98,88.27 90 top
E$39  [LED5MM]  79.12,88.27 90 top
E$40  [LED5MM]  86.74,88.27 90 top
E$41  [LED5MM]  63.88,88.27 90 top
E$42  [LED5MM]  71.5,88.27 90 top
E$43  [LED5MM]  48.64,88.27 90 top
E$44  [LED5MM]  56.26,88.27 90 top
E$45  [LED5MM]  33.4,88.27 90 top
E$46  [LED5MM]  41.02,88.27 90 top
E$47  [LED5MM]  18.16,88.27 90 top
E$48  [LED5MM]  25.78,88.27 90 top
E$49  [LED5MM]  124.84,95.89 90 top
E$50  [LED5MM]  132.46,95.89 90 top
E$51  [LED5MM]  109.6,95.89 90 top
E$52  [LED5MM]  117.22,95.89 90 top
E$53  [LED5MM]  94.36,95.89 90 top
E$54  [LED5MM]  101.98,95.89 90 top
E$55  [LED5MM]  79.12,95.89 90 top
E$56  [LED5MM]  86.74,95.89 90 top
E$57  [LED5MM]  63.88,95.89 90 top
E$58  [LED5MM]  71.5,95.89 90 top
E$59  [LED5MM]  48.64,95.89 90 top
E$60  [LED5MM]  56.26,95.89 90 top
E$61  [LED5MM]  33.4,95.89 90 top
E$62  [LED5MM]  41.02,95.89 90 top
E$63  [LED5MM]  18.16,95.89 90 top
E$64  [LED5MM]  25.78,95.89 90 top
E$65  [LED5MM]  124.84,103.5 90 top
E$66  [LED5MM]  132.46,103.5 90 top
E$67  [LED5MM]  109.6,103.5 90 top
E$68  [LED5MM]  117.22,103.5 90 top
E$69  [LED5MM]  94.36,103.5 90 top
E$70  [LED5MM]  101.98,103.5 90 top
E$71  [LED5MM]  79.12,103.5 90 top
E$72  [LED5MM]  86.74,103.5 90 top
E$73  [LED5MM]  63.88,103.5 90 top
E$74  [LED5MM]  71.5,103.5 90 top
E$75  [LED5MM]  48.64,103.5 90 top
E$76  [LED5MM]  56.26,103.5 90 top
E$77  [LED5MM]  33.4,103.5 90 top
E$78  [LED5MM]  41.02,103.5 90 top
E$79  [LED5MM]  18.16,103.5 90 top
E$80  [LED5MM]  25.78,103.5 90 top
E$81  [LED5MM]  124.84,111.12 90 top
E$82  [LED5MM]  132.46,111.12 90 top
E$83  [LED5MM]  109.6,111.12 90 top
E$84  [LED5MM]  117.22,111.12 90 top
E$85  [LED5MM]  94.36,111.12 90 top
E$86  [LED5MM]  101.98,111.12 90 top
E$87  [LED5MM]  79.12,111.12 90 top
E$88  [LED5MM]  86.74,111.12 90 top
E$89  [LED5MM]  63.88,111.12 90 top
E$90  [LED5MM]  71.5,111.12 90 top
E$91  [LED5MM]  48.64,111.12 90 top
E$92  [LED5MM]  56.26,111.12 90 top
E$93  [LED5MM]  33.4,111.12 90 top
E$94  [LED5MM]  41.02,111.12 90 top
E$95  [LED5MM]  18.16,111.12 90 top
E$96  [LED5MM]  25.78,111.12 90 top
E$97  [LED5MM]  124.84,118.75 90 top
E$98  [LED5MM]  132.46,118.75 90 top
E$99  [LED5MM]  109.6,118.75 90 top
E$100  [LED5MM]  117.22,118.75 90 top
E$101  [LED5MM]  94.36,118.75 90 top
E$102  [LED5MM]  101.98,118.75 90 top
E$103  [LED5MM]  79.12,118.75 90 top
E$104  [LED5MM]  86.74,118.75 90 top
E$105  [LED5MM]  63.88,118.75 90 top
E$106  [LED5MM]  71.5,118.75 90 top
E$107  [LED5MM]  48.64,118.75 90 top
E$108  [LED5MM]  56.26,118.75 90 top
E$109  [LED5MM]  33.4,118.75 90 top
E$110  [LED5MM]  41.02,118.75 90 top
E$111  [LED5MM]  18.16,118.75 90 top
E$112  [LED5MM]  25.78,118.75 90 top
E$113  [LED5MM]  124.84,126.36 90 top
E$114  [LED5MM]  132.46,126.36 90 top
E$115  [LED5MM]  109.6,126.36 90 top
E$116  [LED5MM]  117.22,126.36 90 top
E$117  [LED5MM]  94.36,126.36 90 top
E$118  [LED5MM]  101.98,126.36 90 top
E$119  [LED5MM]  79.12,126.36 90 top
E$120  [LED5MM]  86.74,126.36 90 top
E$121  [LED5MM]  63.88,126.36 90 top
E$122  [LED5MM]  71.5,126.36 90 top
E$123  [LED5MM]  48.64,126.36 90 top
E$124  [LED5MM]  56.26,126.36 90 top
E$125  [LED5MM]  33.4,126.36 90 top
E$126  [LED5MM]  41.02,126.36 90 top
E$127  [LED5MM]  18.16,126.36 90 top
E$128  [LED5MM]  25.78,126.36 90 top
E$139  [SO14]  142.94,99.71 180 top
E$140  [SO14]  7.81,103.49 0 top
E$141  [SO14]  138.24,53.74 180 top
E$142  [SA56-11]  81.85,53.8 0 top
E$143  [SA56-11]  95.31,53.8 0 top
E$144  [SA56-11]  108.77,53.8 0 top
E$145  [SA56-11]  122.23,53.8 0 top
E$146  [SO14]  12.26,53.83 0 top
E$147  [SA56-11]  68.65,53.77 180 top
E$148  [SA56-11]  55.19,53.77 180 top
E$149  [SA56-11]  41.72,53.77 180 top
E$150  [SA56-11]  28.26,53.77 180 top
E$151  [SO14]  138.24,23.13 180 top
E$152  [SA56-11]  81.85,23.19 0 top
E$153  [SA56-11]  95.31,23.19 0 top
E$154  [SA56-11]  108.77,23.19 0 top
E$155  [SA56-11]  122.23,23.19 0 top
E$156  [SO14]  12.26,23.22 0 top
E$157  [SA56-11]  68.65,23.16 180 top
E$158  [SA56-11]  55.19,23.16 180 top
E$159  [SA56-11]  41.72,23.16 180 top
E$160  [SA56-11]  28.26,23.16 180 top

## Library data of the parts
E$1-E$128 = led
E$139-E$141 E$146 E$151 E$156 = analog-devices
E$142-E$145 E$147-E$150 E$152-E$155 E$157-E$160 = display-kingbright

## Tracks (layer width: path | path; a pad name or v marks a point on that pad's centre or on a via)
(copper drawn outside any net)
  shapes: Top area x870

## Text on the board
Unrouted: Vcc | Q7 | Q6 | Q5 | Q4 | MR | cp | gnd | Q3 | Q2 | Q1 | Q0 | B | A | gnd | Q3 | Q2 | Q1 | Q0 | B | A | A | B | Q0 | Q1 | Q2 | Q3 | gnd | cp | MR | Q4 | Q5 | Q6 | Q7 | Vcc | cp | MR | Q4 | Q5 | Q6 | Q7 | Vcc | Q7 | Q6 | Q5 | Q4 | cp | gnd | Q3 | Q2 | Q1 | Q0 | B | A | Vcc | MR | A | B | cp | MR | Q4 | Q5 | Q6 | Q7 | Vcc | Q0 | Q1 | Q2 | Q3 | gnd | gnd | Q3 | Q2 | Q1 | Q0 | Vcc | Q7 | Q6 | Q5 | Q4 | MR | cp | B | A | MR | Vcc | A | B | Q0 | Q1 | Q2 | Q3 | gnd | cp | Q4 | Q5 | Q6 | Q7